# EAGLE board 2560-v2-3.0 (EAGLE 9.6.2)
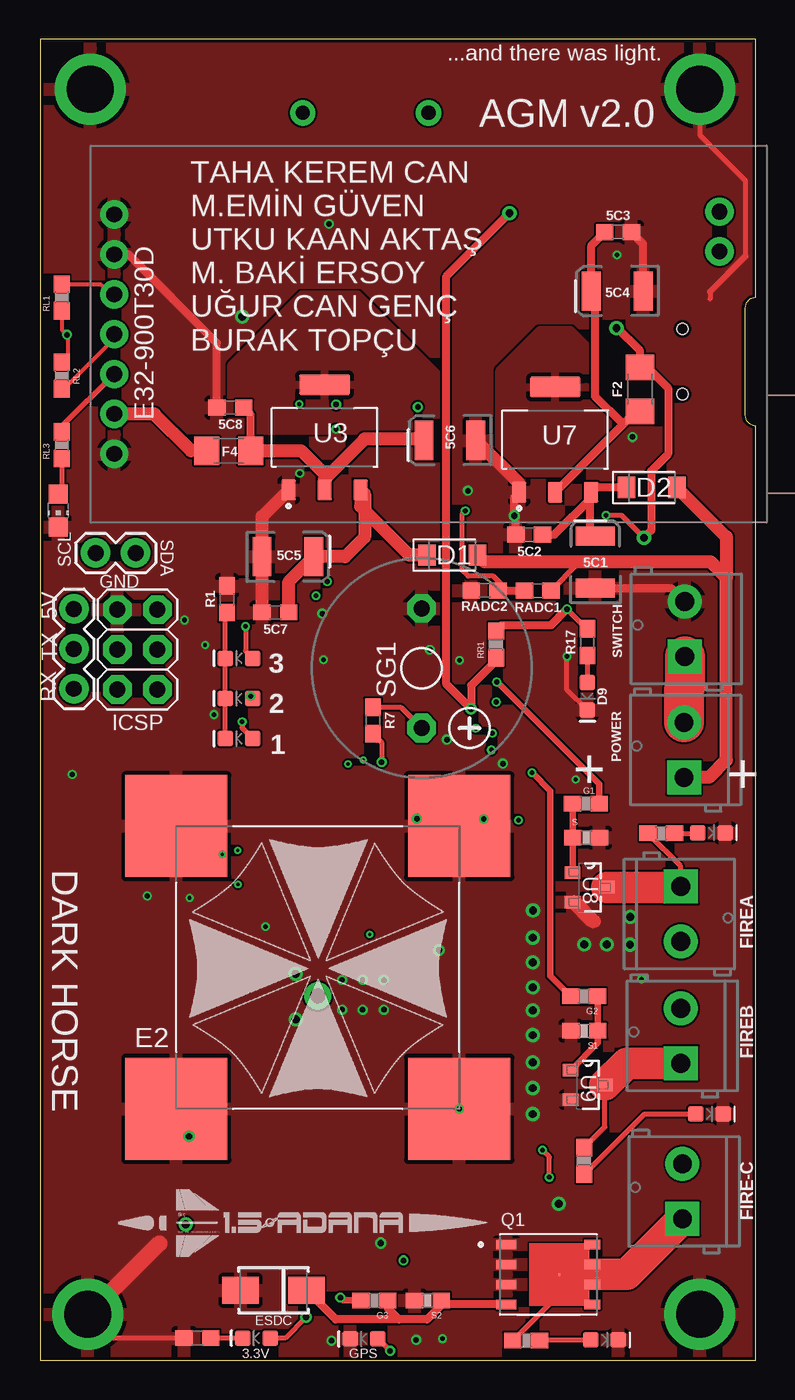
[diagram p0: board, top side]
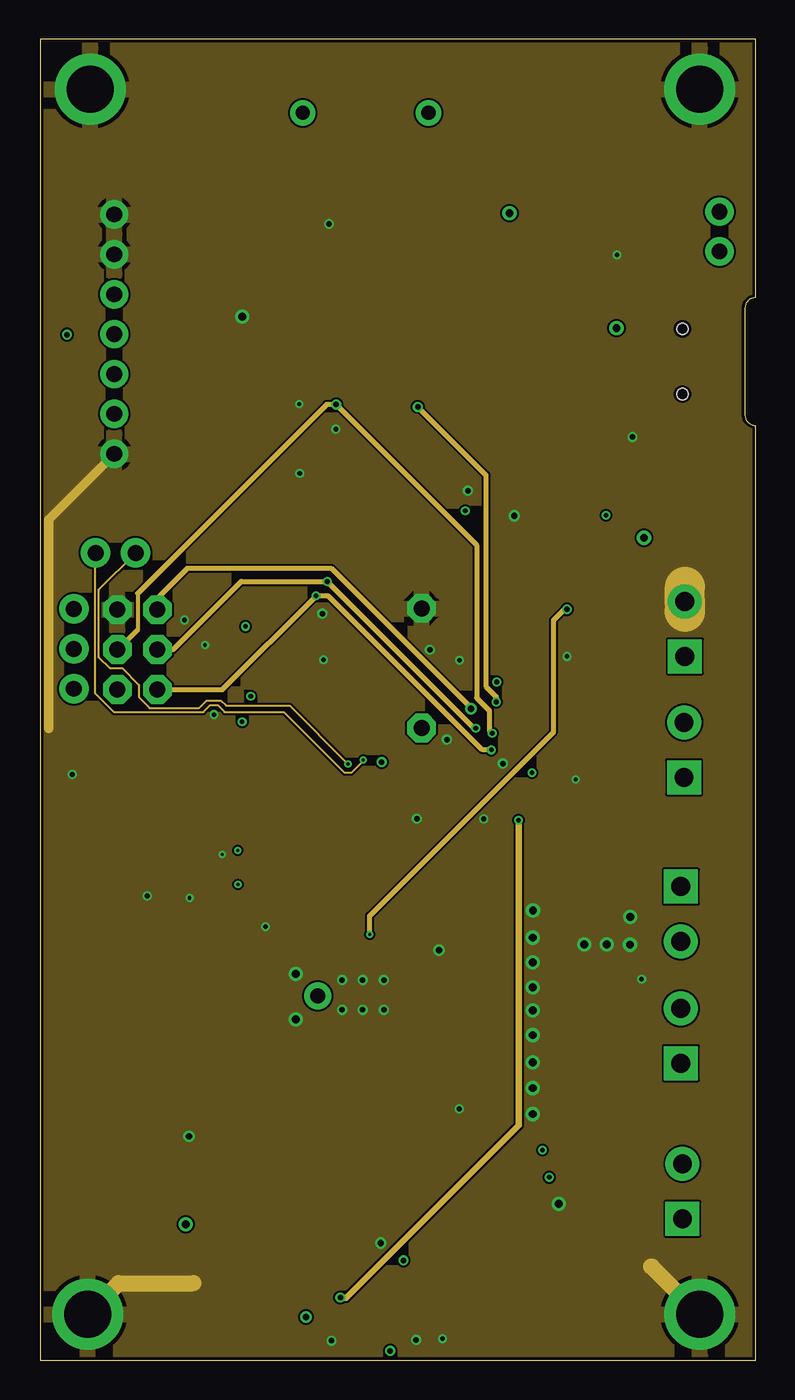
[diagram p1: board, inner layer Route2]
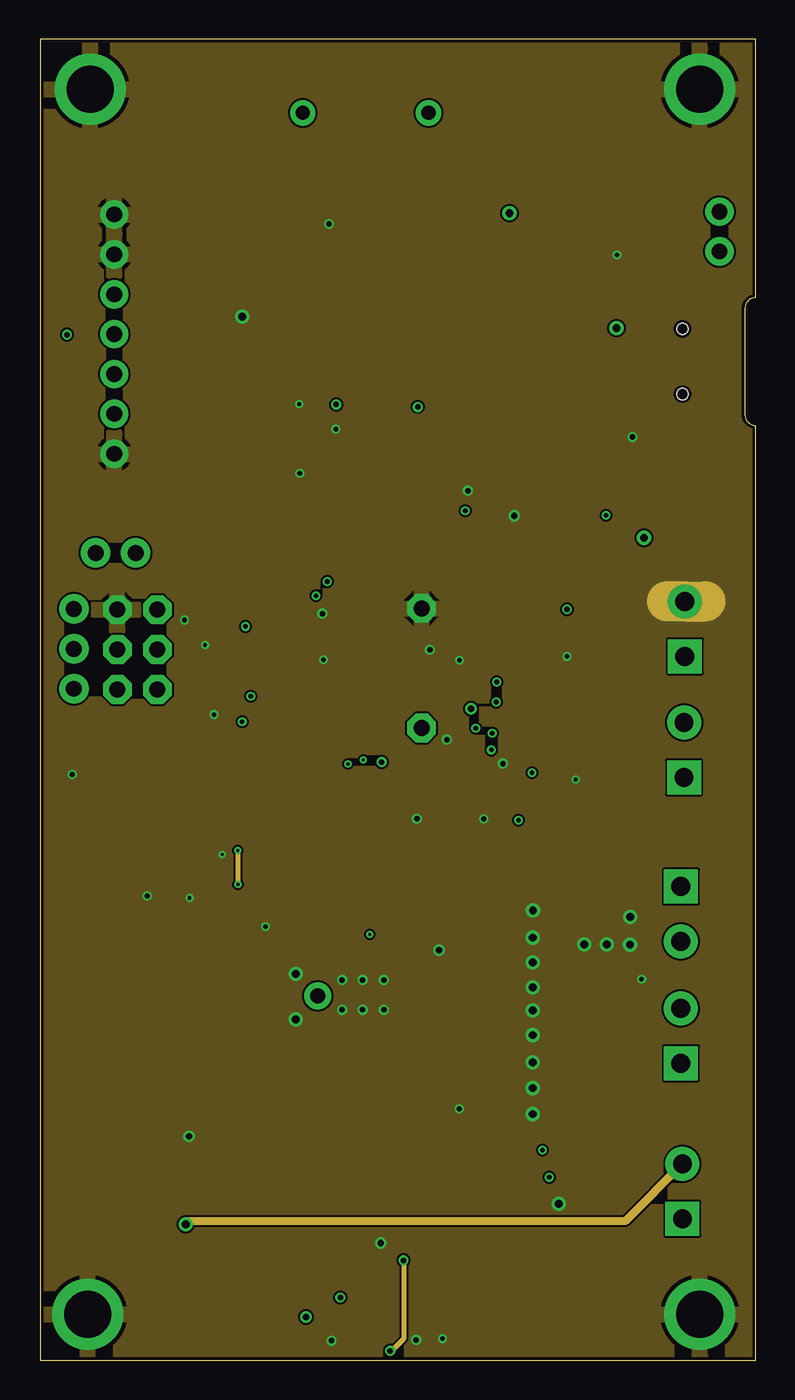
[diagram p2: board, inner layer Route15]
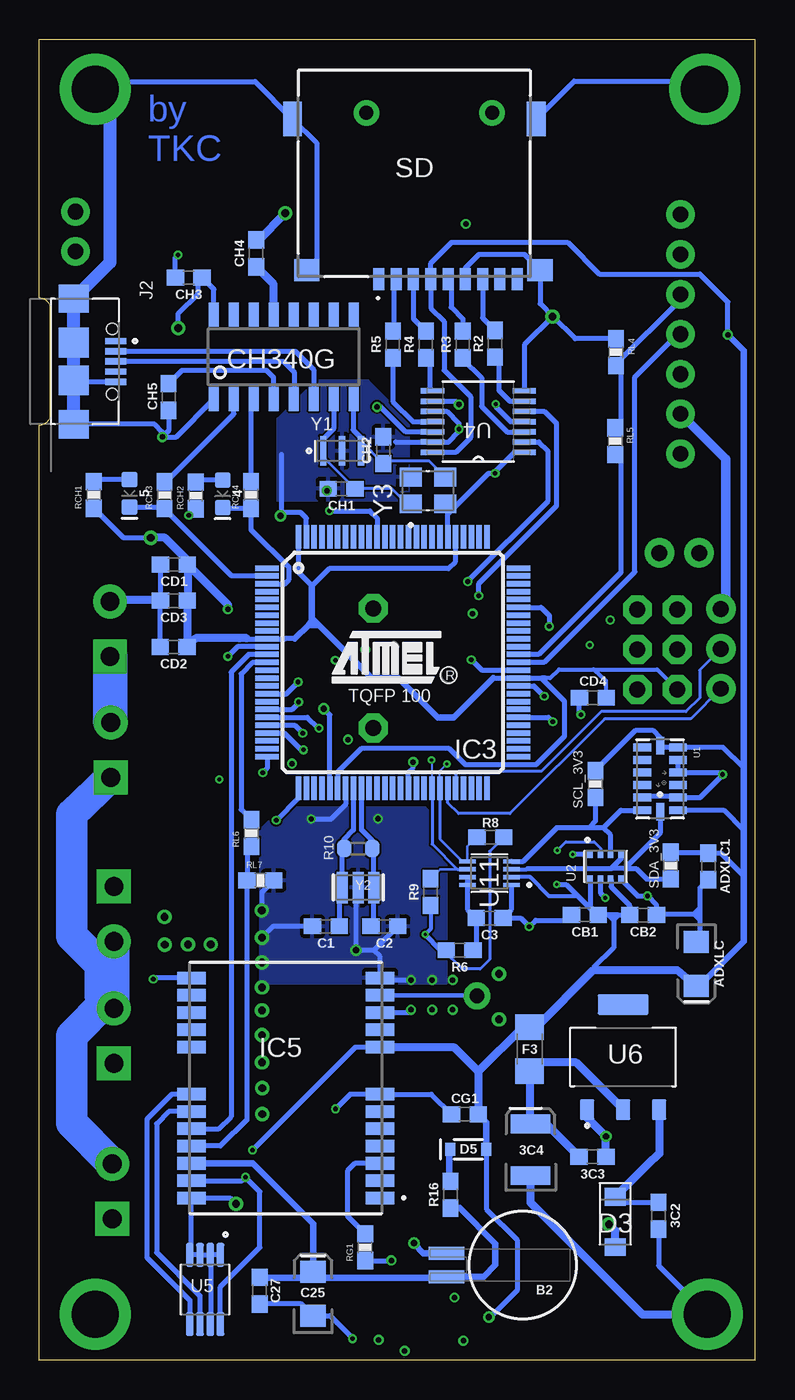
[diagram p3: board, bottom side, seen from below]

Size 45.52 x 84.08 mm. Coordinates in mm from the lower left corner, seen from the top.
Outline: 45.52,84.08 0,84.08 0,0 45.52,0 45.52,59.5 arc-90 44.84,60.18 44.84,66.95 arc-90 45.52,67.63 45.52,84.08
Copper layers (1+2*15+16): Top 0.035mm / dielectric 0.2104mm / Route2 0.0152mm / dielectric 1.065mm / Route15 0.0152mm / dielectric 0.2104mm / Bottom 0.035mm
Design rules "jlcpcb-4layers-edit2 *": minimum track width 3.5mil, minimum drill 0.2mm, track to track 5mil, track to pad 0.2mm, pad to pad 5mil, via to via 0.5mm, smd to smd 5mil, copper to edge 0.2mm, drill to drill 6mil, minimum pad ring 10mil, minimum via ring 0.13mm, stop-mask expansion 0.05mm, vias tented up to drill 0.2mm, thermal gap 10mil
Net classes: 2 gnd: width 0.305 mm, drill 0.406 mm, clearance 0.203 mm

## Footprints (pad centres in the part's own frame; a part is rotated, then mirrored left to right if it is on the bottom)
LED-0603 = smd 1 x 1: A -0.877,0; C 0.877,0
0603 = smd 1.1 x 1: 1 -0.85,0; 2 0.85,0
EIA3528 = smd 1.2 x 2.5: A 1.65,0; C -1.65,0
EIA3216 = smd 1.4 x 1.6: + 1.4,0; - -1.4,0
0603-RES = smd 1.1 x 1: 1 -0.85,0; 2 0.85,0
BATTCON-6.8MM = smd 2.25 x 0.85: + 4.87,0.75; - 4.87,-0.75
SODFL3718X115 = smd 1.115 x 1.361: 1 -1.6,0; 2 1.6,0
SOD-323 = smd 0.63 x 0.83: A 1.15,0; C -1.15,0
XDCR_ANT-GNSSCP-TH18L1 = drill 0.95: 1 0,-1.8 | smd 6.5 x 6.5: 2 9,9; 3 -9,9; 4 -9,-9; 5 9,-9
WE-TVSP_DO-214AC_UNIDIRECTIONAL = smd 2.3 x 1.7: 1 -2.1,0; 2 2.1,0
1206 = smd 1.6 x 1.8: 1 -1.4,0; 2 1.4,0
SCREWTERMINAL-3.5MM-2-NS = drill 1.2 pad 2.032 square: 1 0,0 | drill 1.2 pad 2.032: 2 3.5,0
TQFP100 = smd 1.5 x 0.35: 1 -8,6; 2 -8,5.5; 3 -8,5; 4 -8,4.5; 5 -8,4; 6 -8,3.5; 7 -8,3; 8 -8,2.5; 9 -8,2; 10 -8,1.5; 11 -8,1; 12 -8,0.5; 13 -8,0; 14 -8,-0.5; 15 -8,-1; 16 -8,-1.5; 17 -8,-2; 18 -8,-2.5; 19 -8,-3; 20 -8,-3.5; 21 -8,-4; 22 -8,-4.5; 23 -8,-5; 24 -8,-5.5; 25 -8,-6; 51 8,-6; 52 8,-5.5; 53 8,-5; 54 8,-4.5; 55 8,-4; 56 8,-3.5; 57 8,-3; 58 8,-2.5; 59 8,-2; 60 8,-1.5; 61 8,-1; 62 8,-0.5; 63 8,0; 64 8,0.5; 65 8,1; 66 8,1.5; 67 8,2; 68 8,2.5; 69 8,3; 70 8,3.5; 71 8,4; 72 8,4.5; 73 8,5; 74 8,5.5; 75 8,6 | smd 0.35 x 1.5: 26 -6,-8; 27 -5.5,-8; 28 -5,-8; 29 -4.5,-8; 30 -4,-8; 31 -3.5,-8; 32 -3,-8; 33 -2.5,-8; 34 -2,-8; 35 -1.5,-8; 36 -1,-8; 37 -0.5,-8; 38 0,-8; 39 0.5,-8; 40 1,-8; 41 1.5,-8; 42 2,-8; 43 2.5,-8; 44 3,-8; 45 3.5,-8; 46 4,-8; 47 4.5,-8; 48 5,-8; 49 5.5,-8; 50 6,-8; 76 6,8; 77 5.5,8; 78 5,8; 79 4.5,8; 80 4,8; 81 3.5,8; 82 3,8; 83 2.5,8; 84 2,8; 85 1.5,8; 86 1,8; 87 0.5,8; 88 0,8; 89 -0.5,8; 90 -1,8; 91 -1.5,8; 92 -2,8; 93 -2.5,8; 94 -3,8; 95 -3.5,8; 96 -4,8; 97 -4.5,8; 98 -5,8; 99 -5.5,8; 100 -6,8
NEO-M8T = smd 1.8 x 0.8: 1 6,-7; 2 6,-5.9; 3 6,-4.8; 4 6,-3.7; 5 6,-2.6; 6 6,-1.5; 7 6,-0.4; 8 6,2.6; 9 6,3.7; 10 6,4.8; 11 6,5.9; 12 6,7; 13 -6,7; 14 -6,5.9; 15 -6,4.8; 16 -6,3.7; 17 -6,2.6; 18 -6,-0.4; 19 -6,-1.5; 20 -6,-2.6; 21 -6,-3.7; 22 -6,-4.8; 23 -6,-5.9; 24 -6,-7
2X03 = drill 1.016 octagon: 1 -2.54,-1.27; 2 -2.54,1.27; 3 0,-1.27; 4 0,1.27; 5 2.54,-1.27; 6 2.54,1.27
1X02 = drill 1.016 pad 1.88: 1 0,0; 2 2.54,0
WE_629105136821 = smd 0.4 x 1.35: 1 -1.3,2.675; 2 -0.65,2.675; 3 0,2.675; 4 0.65,2.675; 5 1.3,2.675 | smd 1.8 x 1.9: S1 -4,0; S4 4,0 | smd 1.9 x 1.9: S2 -1.2,0; S3 1.2,0 | hole 0.7: -2.075,2.45; 2.075,2.45
CHIP-LED0805 = smd 1.2 x 1.2: A 0,-1.05; C 0,1.05
TRANS_SIRA12DP-T1-GE3 = smd 1.27 x 0.61: 1 -2.67,1.905; 2 -2.67,0.635; 3 -2.67,-0.635; 4 -2.67,-1.905 | smd 1.02 x 0.61: 5 2.795,-1.905; 6 2.795,-0.635; 7 2.795,0.635; 8 2.795,1.905 | smd 0.15 x 0.15: 9 0.69,0
R0603-ROUND = smd 0.898 x 1.1: 1 -0.889,0; 2 0.889,0
L-KLS1-TF-003-H1.85-R = smd 0.7 x 1.4: 1 2.25,10.6; 2 1.15,10.6; 3 0.05,10.6; 4 -1.05,10.6; 5 -2.15,10.6; 6 -3.25,10.6; 7 -4.35,10.6; 8 -5.45,10.6; 9 -6.55,10.6 | smd 1.6 x 1.4: 10 -8,10; 13 6.85,10 | smd 1.2 x 2.2: 11 -7.75,0.4; 12 7.75,0.4 | drill 0.9 pad 1.4: 14 3.05,0; 15 -4.95,0
F/CM12P = drill 1.016 pad 1.676 octagon: + 3.81,0; - -3.81,0
LGA14_1:1_PATRICK = smd 0.5 x 1.124: 1 2,1.138; 2 1.2,1.138; 3 0.4,1.138; 4 -0.4,1.138; 5 -1.2,1.138; 6 -2,1.138; 8 -2,-1.13; 9 -1.2,-1.138; 10 -0.4,-1.138; 11 0.4,-1.138; 12 1.2,-1.138; 13 2,-1.138 | smd 1.124 x 0.5: 7 -2.1,0; 14 2.1,0
XDCR_BMP280 = smd 0.5 x 0.35: 1 0.8,0.975; 2 0.8,0.325; 3 0.8,-0.325; 4 0.8,-0.975; 5 -0.8,-0.975; 6 -0.8,-0.325; 7 -0.8,0.325; 8 -0.8,0.975
SOT229P700X180-4N = smd 0.93 x 1.31: 1 -2.29,-3.345; 2 0,-3.345; 3 2.29,-3.345 | smd 3.24 x 1.31: 4 0,3.345
SOP65P640X110-14N = smd 1.473 x 0.356: 1 -2.921,1.956; 2 -2.921,1.295; 3 -2.921,0.66; 4 -2.921,0; 5 -2.921,-0.66; 6 -2.921,-1.295; 7 -2.921,-1.956; 8 2.921,-1.956; 9 2.921,-1.295; 10 2.921,-0.66; 11 2.921,0; 12 2.921,0.66; 13 2.921,1.295; 14 2.921,1.956
SOP65P490X110-8N = smd 1.5 x 0.49: 1 -2.105,0.975; 2 -2.105,0.325; 3 -2.105,-0.325; 4 -2.105,-0.975; 5 2.3,-0.975; 6 2.3,-0.325; 7 2.3,0.325; 8 2.3,0.975
SOT95P240X112-3N = smd 0.972 x 0.802: D 1.092,0; G -1.092,0.94; S -1.092,-0.94
SOP50P310X90-8N = smd 1.12 x 0.27: 1 -1.405,0.75; 2 -1.405,0.25; 3 -1.405,-0.25; 4 -1.405,-0.75; 5 1.405,-0.75; 6 1.405,-0.25; 7 1.405,0.25; 8 1.405,0.75
SOIC16 = smd 0.635 x 1.524: 1 -4.445,-2.695; 2 -3.175,-2.695; 3 -1.905,-2.695; 4 -0.635,-2.695; 5 0.635,-2.695; 6 1.905,-2.695; 7 3.175,-2.695; 8 4.445,-2.695; 9 4.445,2.695; 10 3.175,2.695; 11 1.905,2.695; 12 0.635,2.695; 13 -0.635,2.695; 14 -1.905,2.695; 15 -3.175,2.695; 16 -4.445,2.695
DELIK = drill 3 pad 4.5: P$1 0,0
LORA30 = drill 1 pad 1.778: 1 40,19.8; 2 40,17.26; 10 1.5,19.62; 11 1.5,17.08; 12 1.5,14.54; 13 1.5,12; 14 1.5,9.46; 15 1.5,6.92; 16 1.5,4.38
1X03 = drill 1.016 pad 1.88: 1 0,0; 2 2.54,0; 3 5.08,0
OSC_CSTCE12M0G55-R0 = smd 0.4 x 1.9: 1 -1.2,0; 2 0,0; 3 1.2,0
RESONATOR = smd 0.7 x 2: 1 -1,0; 2 0,0; 3 1,0
XTAL_ABM8G-12.000MHZ-18-D2Y-T = smd 1.2 x 1.4: 1 -0.85,1.1; 2 -0.85,-1.1; 3 0.85,-1.1; 4 0.85,1.1

## Placement (x,y rotation side)
1  [LED-0603]  12.66,39.56 180 top
2  [LED-0603]  12.66,42.12 180 top
3  [LED-0603]  12.66,44.68 180 top
3C2  100nF  [0603]  6.12,9.2 270 bottom
3C3  100nF  [0603]  10.32,12.95 0 bottom
3C4  22uF  [EIA3528]  14.27,13.4 90 bottom
4  [LED-0603]  33.85,55.16 270 bottom
5  [LED-0603]  39.78,55.17 270 bottom
5C1  22uF  [EIA3528]  35.32,50.8 90 top
5C2  100nF  [0603]  31.12,52.55 180 top
5C3  100nF  [0603]  36.77,71.8 0 top
5C4  22uF  [EIA3528]  36.72,68.05 180 top
5C5  22uF  [EIA3528]  15.77,51.15 0 top
5C6  22uF  [EIA3528]  26.07,58.55 180 top
5C7  100nF  [0603]  14.97,47.6 180 top
5C8  100nF  [0603]  12.1,60.64 180 top
ADXLC  10uF  [EIA3216]  3.71,25.23 270 bottom
ADXLC1  0.1uF  [0603]  2.95,31.43 270 bottom
APGLED  4.7k  [0603-RES]  39.52,33.54 180 top
APGLED1  4.7k  [0603-RES]  34.62,12.69 90 top
APGLED2  4.7k  [0603-RES]  30.92,1.25 180 top
B2  6.8MM_COIN_CELL  [BATTCON-6.8MM]  14.75,6.06 180 bottom
C1  18pU  [0603]  27.29,27.62 180 bottom
C2  18pU  [0603]  23.56,27.62 180 bottom
C3  100pF  [0603]  16.87,28.15 180 bottom
C25  4.7uF  [EIA3216]  28.1,4.24 90 bottom
C27  100nF  [0603]  31.49,4.43 90 bottom
CB1  100nF  [0603]  10.81,28.35 0 bottom
CB2  100nF  [0603]  7.1,28.34 180 bottom
CD1  100nF  [0603]  36.95,50.65 180 bottom
CD2  100nF  [0603]  36.97,45.4 180 bottom
CD3  100nF  [0603]  36.96,48.35 180 bottom
CD4  100nF  [0603]  10.3,42.16 0 bottom
CG1  1uF  [0603]  18.44,15.65 0 bottom
CH1  22pF  [0603]  26.29,55.47 180 bottom
CH2  22pF  [0603]  23.63,57.92 90 bottom
CH3  100nF  [0603]  36.01,68.91 180 bottom
CH4  100nF  [0603]  31.72,70.45 90 bottom
CH5  100nF  [0603]  37.29,61.31 270 bottom
D1  B5819W  [SODFL3718X115]  26.22,51.25 0 top
D2  B5819W  [SODFL3718X115]  38.92,55.55 0 top
D3  B5819W  [SODFL3718X115]  8.87,8.8 270 bottom
D4  [LED-0603]  20.6,1.36 180 top
D5  0.5A/40V/420mV  [SOD-323]  18.23,13.43 0 bottom
D6  [LED-0603]  13.76,1.41 180 top
D9  [LED-0603]  34.82,42.25 270 top
E2  ANT-GNSSCP-TH18L1  [XDCR_ANT-GNSSCP-TH18L1]  17.67,25 0 top
ESDC  12V  [WE-TVSP_DO-214AC_UNIDIRECTIONAL]  14.85,4.45 180 top
F2  1A  [1206]  38.17,61.8 90 top
F3  0.75A  [1206]  14.32,19.8 90 bottom
F4  1A  [1206]  12,57.89 180 top
FIRE-C  [SCREWTERMINAL-3.5MM-2-NS]  40.87,9 90 top
FIREA  [SCREWTERMINAL-3.5MM-2-NS]  40.77,30.15 270 top
FIREB  [SCREWTERMINAL-3.5MM-2-NS]  40.77,18.9 90 top
G1  22  [0603-RES]  34.73,35.43 0 top
G2  22  [0603-RES]  34.61,23.17 180 top
G3  22  [0603-RES]  21.27,3.8 180 top
IC3  ATMEGA2560-16AU  [TQFP100]  23.03,44.42 0 bottom
IC5  NEO-M8N-0  [NEO-M8T]  29.84,17.33 0 bottom
ICSP  ICSP  [2X03]  6.19,45.23 90 top
J1  [1X02]  3.53,51.38 0 top
J2  629105136821  [WE_629105136821]  43.33,63.57 270 bottom
ON4  GREEN  [CHIP-LED0805]  1.15,54.08 180 top
POWER  [SCREWTERMINAL-3.5MM-2-NS]  40.97,37.1 90 top
Q1  SIRA12DP-T1-GE3  [TRANS_SIRA12DP-T1-GE3]  32.34,5.46 0 top
R1  1k  [0603]  11.89,48.44 90 top
R2  3.3k  [0603]  16.52,64.7 90 bottom
R3  3.3k  [0603]  18.57,64.65 90 bottom
R4  3.3k  [0603]  20.92,64.65 90 bottom
R5  3.3k  [0603]  23.02,64.65 90 bottom
R6  200k  [0603]  18.77,26.1 180 bottom
R7  1k  [0603]  21.18,40.72 270 top
R8  1k  [0603]  16.82,33.3 180 bottom
R9  1k  [0603]  20.62,29.8 90 bottom
R10  1M  [R0603-ROUND]  25.23,32.56 180 bottom
R16  1k  [0603]  19.36,10.54 90 bottom
R17  1k  [0603]  34.82,45.7 90 top
R27  1k  [0603]  10.01,1.41 180 top
RADC1  220  [0603]  31.66,48.99 180 top
RADC2  300  [0603]  28.28,48.99 0 top
RCH1  1k  [0603-RES]  42.05,55.08 90 bottom
RCH2  1k  [0603-RES]  35.56,55.04 90 bottom
RCH3  1k  [0603-RES]  37.55,55.06 90 bottom
RCH4  1k  [0603-RES]  32.05,55.08 90 bottom
RD1  Blue  [LED-0603]  42.58,15.68 0 top
RD2  Blue  [LED-0603]  42.71,33.57 0 top
RD3  Blue  [LED-0603]  35.92,1.3 0 top
RG1  1k  [0603-RES]  24.78,7.19 90 bottom
RL1  4.7K  [0603-RES]  1.38,67.65 90 top
RL2  4.7K  [0603-RES]  1.37,62.68 270 top
RL3  330  [0603-RES]  1.38,58.24 90 top
RL4  20k  [0603-RES]  8.83,64.16 270 bottom
RL5  10k  [0603-RES]  8.87,58.5 270 bottom
RL6  10k  [0603-RES]  32.02,33.55 90 bottom
RL7  20k  [0603-RES]  31.45,30.54 0 bottom
RR1  10k  [0603-RES]  29.02,45.57 90 top
S  4.7k  [0603-RES]  34.74,33.26 0 top
S1  4.7k  [0603-RES]  34.63,20.97 180 top
S2  4.7k  [0603-RES]  24.67,3.8 180 top
SCL_3V3  10k  [0603-RES]  10.13,36.67 90 bottom
SD  L-KLS1-TF-003-H1.85-R  [L-KLS1-TF-003-H1.85-R]  21.66,79.4 180 bottom
SDA_3V3  10k  [0603-RES]  5.34,31.48 90 bottom
SG1  F/CM12P  [F/CM12P]  24.27,44.05 270 top
SWITCH  [SCREWTERMINAL-3.5MM-2-NS]  41.02,44.8 90 top
U1  ADXL345PATRICK  [LGA14_1:1_PATRICK]  6.02,37.01 270 bottom
U2  BMP280  [XDCR_BMP280]  9.49,31.42 90 bottom
U3  AMS1117-5.0  [SOT229P700X180-4N]  18.1,58.74 0 top
U4  74LVC125APW,118  [SOP65P640X110-14N]  17.58,59.74 180 bottom
U5  24AA32A-I/MS  [SOP65P490X110-8N]  34.97,4.6 270 bottom
U6  AMS1117-3.3  [SOT229P700X180-4N]  8.37,19.3 0 bottom
U7  AMS1117-5.0  [SOT229P700X180-4N]  32.77,58.6 0 top
U8  SI2308CDS-T1-GE3  [SOT95P240X112-3N]  34.97,30.1 0 top
U9  SI2308CDS-T1-GE3  [SOT95P240X112-3N]  34.84,17.52 0 top
U11  PCA9306DCUR  [SOP50P310X90-8N]  16.87,31 180 bottom
U$1  CH340G  [SOIC16]  29.97,63.87 0 bottom
U$2  [1.5-2]  4.97,3.95 0 top
U$3  [ATMEL]  26.88,41.82 0 bottom
U$4  3MM  [DELIK]  3.02,2.92 0 top
U$5  3MM  [DELIK]  41.97,2.92 0 top
U$6  3MM  [DELIK]  3.19,80.89 0 top
U$7  3MM  [DELIK]  41.97,80.89 0 top
U$8  LORA30  [LORA30]  3.22,53.31 0 top
U$11  [UMBRE]  7,12.92 0 top
UART  455-1750-1-ND  [1X03]  2.15,42.74 90 top
Y1  CSTCE12M0G55-R0  [OSC_CSTCE12M0G55-R0]  26.25,57.88 0 bottom
Y2  CSTCE16M0V53-R0 16MHZ  [RESONATOR]  25.23,30.09 0 bottom
Y3  ABM8G-12.000MHZ-18-D2Y-T  [XTAL_ABM8G-12.000MHZ-18-D2Y-T]  20.79,55.36 90 bottom

## Library data of the parts
1-5 D4 D6 D9 = SparkFun-LED
3C2 3C3 5C2 5C3 5C7 5C8 C27 CB1 CB2 = SparkFun-Capacitors; PROD_ID: CAP-00868
3C4 5C1 5C4-5C6 = SparkFun-Capacitors; PROD_ID: CAP-08310
ADXLC C25 = SparkFun-Capacitors; PROD_ID: CAP-00811
ADXLC1 = SparkFun-Capacitors; PROD_ID: CAP-00810
APGLED APGLED1 APGLED2 G1-G3 RCH1-RCH4 RG1 RL1-RL7 RR1 S S1 S2 SCL_3V3 SDA_3V3 = SparkFun-Resistors; PROD_ID: RES-08296
B2 = SparkFun-Batteries; PROD_ID: BATT-13734
C1 C2 CD1-CD4 CG1 CH1-CH5 = SparkFun-Capacitors; PROD_ID: CAP-09137
C3 = SparkFun-Capacitors; PROD_ID: CAP-07883
D1-D3 = Diode; CATEGORY: Diode; DESCRIPTION: DIODE SCHOTTKY 20V 500MA SOD123; MANUFACTURER: ON Semiconductor; MPN: MBR0520LT1G; SUB-CATEGORY: Schottky
D5 = SparkFun-DiscreteSemi; PROD_ID: DIO-10955
E2 = ANT-GNSSCP-TH18L1; AVAILABILITY: In Stock; DESCRIPTION: 1.575GHz, 1.602GHz Beidou, Galileo, GLONASS, GNSS, GPS Ceramic Patch RF Antenna 1.567GHz ~ 1.609GHz 5.1dBi, 2.8dBi, 4dBi Pin Adhesive; MF: Linx; MP: ANT-GNSSCP-TH18L1; PACKAGE: None; PRICE: None; PURCHASE-URL: https://pricing.snapeda.com/search/part/ANT-GNSSCP-TH18L1/?ref=eda
ESDC = Wurth_EMC Components_WE-TVSP; DATASHEET-URL: https://www.we-online.com/catalog/datasheet/824500102.pdf; IPEAK: 2.5A; MOUNT: SMT; PART-NUMBER: 824500102; PDISS: 400W; VBR: 117V; VCLAMP: 162V
F2-F4 = SparkFun-Fuses; PROD_ID: RES-08585
FIRE-C FIREA FIREB POWER SWITCH = SparkFun-Connectors; PROD_ID: CONN-08399
IC3 = atmel-2005
IC5 = NEO-M8N-0; DESCRIPTION: IC RECEIVER GPS/GNSS 24LCC; HEIGHT: mm; MANUFACTURER_NAME: U-Blox; MANUFACTURER_PART_NUMBER: NEO-M8N-0; MOUSER_PART_NUMBER: 377-NEO-M8N-0; MOUSER_PRICE-STOCK: https://www.mouser.co.uk/ProductDetail/u-blox/NEO-M8N-0?qs=zW32dvEIR3unZhZI0KRbew%3D%3D
ICSP = pinhead
J1 = SparkFun-Connectors
J2 = 629105136821; AVAILABILITY: In Stock; DESCRIPTION: USB - micro B USB 2.0 Receptacle Connector 5 Position Surface Mount, Right Angle; MF: Würth Elektronik; MP: 629105136821; PACKAGE: None; PRICE: None; PURCHASE-URL: https://pricing.snapeda.com/search/part/629105136821/?ref=eda
ON4 = led
Q1 = KARTSON-RE; AVAILABILITY: In Stock; DESCRIPTION: P-Channel 40 V 11A (Ta) 1.9W (Ta) Surface Mount PowerPAK® SO-8; MF: Vishay; MP: SI7463DP; PACKAGE: SO-8 Vishay; PRICE: None; PURCHASE-URL: https://pricing.snapeda.com/search/part/SI7463DP/?ref=eda
R1 R7-R9 R16 R17 R27 = SparkFun-Resistors; PROD_ID: RES-07856
R2-R5 = SparkFun-Resistors; PROD_ID: RES-07851
R6 = SparkFun-Resistors; PROD_ID: RES-09385
R10 Y2 = SmartPrj
RADC1 = SparkFun-Resistors-tkc; PROD_ID: RES-07861
RADC2 = SparkFun-Resistors-tkc; PROD_ID: RES-10328
RD1-RD3 = SparkFun-LED; PROD_ID: DIO-11154
SD = L-KLS1-TF-003-H1.85-R; DESCRIPTION: Micro SD Card Connector; HEIGHT: mm; MANUFACTURER_NAME: KLS Electronic; MANUFACTURER_PART_NUMBER: L-KLS1-TF-003-H1.85-R
SG1 = buzzer; OC_FARNELL: unknown; OC_NEWARK: unknown
U1 = Testing
U2 = BMP280; AVAILABILITY: Warning; DESCRIPTION: Pressure Sensor 4.35PSI ~ 15.95PSI (30kPa ~ 110kPa) Absolute 16b 8-SMD; MF: Bosch; MP: BMP280; PACKAGE: SMD-8 Bosch Sensortec; PRICE: None; PURCHASE-URL: https://pricing.snapeda.com/search/part/BMP280/?ref=eda
U3 U6 U7 = AMS1117-3.3; AVAILABILITY: Unavailable; DESCRIPTION: Sot223/Pkg 1-Amp 3.3-Volt Low Drop Out Voltage Regulatator; MF: Advanced Monolithic Systems; MP: AMS1117-3.3; PACKAGE: SOT-89 ams; PRICE: None
U4 = 74LVC125APW_118; AVAILABILITY: In Stock; DESCRIPTION: Buffer, Non-Inverting 4 Element 1 Bit per Element 3-State Output 14-TSSOP; MF: Nexperia USA Inc.; MP: 74LVC125APW,118; PACKAGE: TSSOP14-14 Nexperia USA Inc.; PRICE: None; PURCHASE-URL: https://pricing.snapeda.com/search/part/74LVC125APW,118/?ref=eda
U5 = 24AA32A-I_MS; AVAILABILITY: In Stock; DESCRIPTION: EEPROM Memory IC 32Kb (4K x 8) I²C 400 kHz 900 ns 8-MSOP; MF: Microchip; MP: 24AA32A-I/MS; PACKAGE: MSOP-8 Microchip; PRICE: None; PURCHASE-URL: https://pricing.snapeda.com/search/part/24AA32A-I/MS/?ref=eda
U8 U9 = IRLML6344TRPBF; AVAILABILITY: Good; DESCRIPTION: N-Channel 30V 5A (Ta) 1.3W (Ta) Surface Mount Micro3™/SOT-23; MF: Infineon Technologies; MP: IRLML6344TRPBF; PACKAGE: SOT-23 Multicomp; PRICE: None; PURCHASE-URL: https://pricing.snapeda.com/search/part/IRLML6344TRPBF/?ref=eda
U11 = PCA9306DCUR; AVAILABILITY: In Stock; DESCRIPTION: 2-bit bidirectional 400-kHz I2C/SMBus voltage level translator; MF: Texas Instruments; MP: PCA9306DCUR; PACKAGE: VSSOP-8 Texas Instruments; PRICE: None; PURCHASE-URL: https://pricing.snapeda.com/search/part/PCA9306DCUR/?ref=eda
U$1 U$3 = CH340G
U$2 U$4-U$8 U$11 = KARTSON-RE
UART = SparkFun-Connectors; PROD_ID: XXX-00000
Y1 = CSTCE12M0G55-R0; AVAILABILITY: In Stock; DESCRIPTION: 12 MHz Ceramic Resonator Built in Capacitor 33 pF ±0.2% 30 Ohms -20°C ~ 80°C Surface Mount; MF: Murata Electronics; MP: CSTCE12M0G55-R0; PACKAGE: SMD-3 Murata; PRICE: None; PURCHASE-URL: https://pricing.snapeda.com/search/part/CSTCE12M0G55-R0/?ref=eda
Y3 = ABM8G-12.000MHZ-18-D2Y-T; AVAILABILITY: In Stock; DESCRIPTION: 12 MHz ±20ppm Crystal 18pF 120 Ohms 4-SMD, No Lead; MF: Abracon; MP: ABM8G-12.000MHZ-18-D2Y-T; PACKAGE: SMD-4 Abracon; PRICE: None; PURCHASE-URL: https://pricing.snapeda.com/search/part/ABM8G-12.000MHZ-18-D2Y-T/?ref=eda

## Nets
3.3V: ADXLC1.1 ADXLC.+ CB1.2 CB2.2 CG1.2 D5.A D6.A F3.2 IC5.8 IC5.23 RL1.1 RL2.1 SCL_3V3.2 SD.4 SDA_3V3.2 U1.1 U1.6 U1.7 U2.2 U2.6 U2.8 U4.14 U5.8 U11.2
5V: CD1.1 CD2.1 CD3.1 CD4.2 CH3.1 F2.2 IC3.10 IC3.31 IC3.61 IC3.80 IC3.100 ICSP.2 R6.2 R8.1 R9.1 R17.2 RCH1.1 RCH2.1 RR1.2 U$1.16
5VL: F4.2 U$8.15 UART.3
A7: IC3.90 RADC1.2 RADC2.2
CS: IC3.19 U4.12
CS3: R5.1 U4.11
D8-A: G1.2 IC3.17
D12-B: G2.2 IC3.25
D13-C: G3.2 IC3.26
D30-LED2: 2.A IC3.60
D34-LED1: 1.A IC3.56
D39-LED3: 3.A IC3.70
D44-BUZZER: IC3.40 R7.2
DAT1: SD.8
DAT2: SD.1
DATA+: J2.3 U$1.5
DATA-: J2.2 U$1.6
DTR: CH4.2 IC3.30 ICSP.5 RR1.1
GND: 3C2.2 3C3.2 3C4.C 5C1.C 5C2.2 5C3.2 5C4.C 5C5.C 5C6.C 5C7.2 5C8.2 ADXLC1.2 ADXLC.- B2.- C1.2 C2.1 C3.1 C25.- C27.1 CB1.1 CB2.1 CD1.2 CD2.2 CD3.2 CD4.1 CG1.1 CH1.2 CH2.2 CH3.2 CH5.2 D4.C D9.C E2.2 E2.3 E2.4 E2.5 ESDC.2 IC3.11 IC3.32 IC3.62 IC3.81 IC3.99 IC5.7 IC5.10 IC5.12 IC5.13 IC5.24 ICSP.6 J2.5 J2.S1 J2.S2 J2.S3 J2.S4 ON4.C Q1.1 Q1.2 Q1.3 R1.2 R27.2 RADC2.1 RD1.C RD2.C RD3.C RL4.1 RL7.2 S1.2 S2.2 S.2 SD.6 SD.10 SD.11 SD.12 SD.13 SG1.- SWITCH.2 U1.2 U1.4 U1.5 U1.12 U2.1 U2.5 U2.7 U3.1 U4.1 U4.4 U4.7 U4.10 U4.13 U5.1 U5.2 U5.3 U5.4 U5.7 U6.1 U7.1 U8.S U9.S U11.1 U$1.1 U$4.P$1 U$5.P$1 U$6.P$1 U$7.P$1 U$8.10 U$8.11 U$8.16 Y1.2 Y2.2 Y3.2 Y3.4
GSCL: IC5.19 U5.6
GSDA: IC5.18 U5.5
HT: U7.4
HT1: U3.4
HT2: U6.4
LRX: RL1.2 RL4.2 RL5.1 U$8.12
MISO: IC3.22 ICSP.1 U4.5
MISO3: R2.1 U4.6
MOSI: IC3.21 ICSP.4 U4.9
MOSI3: R4.1 U4.8
N$1: J2.4
N$2: POWER.2 SWITCH.1
N$3: 5C1.A 5C2.1 D2.1 U7.3
N$4: RCH3.2 U$1.2
N$5: RCH4.2 U$1.3
N$6: J2.1
N$7: CH5.1 U$1.4
N$8: CH1.1 U$1.7 Y1.1 Y3.1
N$9: 5.A RCH1.2
N$10: 4.A RCH2.2
N$12: CH4.1 U$1.13
N$13: E2.1 IC5.11
N$14: 5C3.1 5C4.A F2.1 U7.2
N$15: R2.2 SD.7
N$16: D9.A R17.1
N$17: SD.9
N$18: 3C2.1 D3.1 U6.3
N$19: G1.1 S.1 U8.G
N$20: APGLED.1 RD2.A
N$21: G2.1 S1.1 U9.G
N$22: APGLED1.1 RD1.A
N$23: CH2.1 U$1.8 Y1.3 Y3.3
N$25: ESDC.1 G3.1 Q1.4 S2.1
N$26: 3C3.1 3C4.A F3.1 U6.2
N$27: RL3.2 U$8.14
N$28: ON4.A RL3.1
N$29: IC5.3 RG1.2
N$30: D6.C R27.1
N$31: 5C5.A 5C7.1 D1.1 U3.3
N$32: D4.A RG1.1
N$33: 5C6.A 5C8.1 F4.1 U3.2
N$34: 1.C 2.C 3.C R1.1
N$35: D5.C R16.2
N$36: APGLED2.1 RD3.A
N$37: R7.1 SG1.+
N$38: R3.2 SD.5
N$39: R4.2 SD.3
N$40: R5.2 SD.2
N$47: C3.2 R6.1 U11.7 U11.8
RX: 4.C IC3.3 RCH4.1
RX1: IC3.45 UART.1
RX2: IC3.12 IC5.20
RX3: IC3.63 RL2.2 U$8.13
SCK: IC3.20 ICSP.3 U4.2
SCK3: R3.1 U4.3
SCL: SDA_3V3.1 U1.14 U2.4 U11.3
SCL5: IC3.43 J1.1 R9.2 U11.6
SDA: SCL_3V3.1 U1.13 U2.3 U11.4
SDA5: IC3.44 J1.2 R8.2 U11.5
TX: 5.C IC3.2 RCH3.1
TX1: IC3.46 UART.2
TX2: IC3.13 RL6.2
TX3: IC3.64 RL5.2
TX3.3: IC5.21 RL6.1 RL7.1
V_BCKP: B2.+ C25.+ C27.2 IC5.22 R16.1
VAPG: APGLED.2 FIREA.1 U8.D
VC: APGLED2.2 FIRE-C.1 Q1.5 Q1.6 Q1.7 Q1.8 Q1.9
VCC: D1.2 D2.2 D3.2 FIRE-C.2 FIREA.2 FIREB.2 POWER.1 RADC1.1
VMAIN: APGLED1.2 FIREB.1 U9.D
XTAL1: C2.2 IC3.34 R10.1 Y2.3
XTAL2: C1.1 IC3.33 R10.2 Y2.1

## Tracks (layer width: path | path; a pad name or v marks a point on that pad's centre or on a via)
3.3V  (via drill 0.2, 0.3, 0.35, 0.41)
  Top 0.254: RL2.1 1.37,63.56 1.75,63.94 1.75,65.22 v1.71,65.26 v1.71,65.27 1.38,65.6 RL1.1
  Top 0.305: v32.4,11.65 32.4,12.93 v31.96,13.37 | v16.92,2.75 15.58,1.41 D6.A
  Route15 0.305: v12.59,30.28 12.59,32.43 v12.57,32.45
  Bottom 0.2: v12.57,32.45 12.02,33 10.22,33 9.8,32.58 U2.2
  Bottom 0.254: U11.2 14.29,30.75 13.08,29.53 11.25,29.53 10.15,28.43 10.07,28.35 CB1.2
  Bottom 0.305: IC5.23 32.62,11.43 v32.4,11.65 31.48,10.73 31.48,7.18 34,4.67 U5.8 | v31.96,13.37 25.4,19.93 IC5.8 23.81,19.9 | SCL_3V3.2 7.56,40.1 6.5,40.1 6.02,39.62 U1.7 5.92,39.01 U1.6 2.02,39.01 0.7,37.69 0.69,37.68 | D5.A 17.08,9.61 15.12,7.65 15.12,4.45 16.87,2.7 v16.92,2.75 | U2.8 10.46,28.86 CB1.2 9.29,28.34 | 8.69,28.34 CB2.2 7.95,28.94 9.14,30.13 9.14,30.6 U2.6 | 8.69,28.34 9.29,28.34 | v1.71,65.27 1.71,67.36 3.48,69.14 9.89,69.14 11.9,71.15 19.29,71.15 20.61,69.83 SD.4 20.61,66.97 19.77,66.12 19.77,63.02 18.08,61.33 18.08,58.74 19.04,57.78 U4.14 | 8.69,28.34 8.98,28.05 | 8.98,28.05 8.98,26.25 10.26,24.97 10.26,24.83 | ADXLC.+ 3.52,23.83 | U1.1 1.98,35.01 0.69,33.72 | 0.69,30.81 2.16,32.28 ADXLC1.1 5.29,32.28 SDA_3V3.2 | v12.59,30.28 12,30.28 10.15,28.43 | 8.98,28.05 9,28.05 9.29,28.34
  Bottom 0.406: D5.A 17.08,15.14 CG1.2 | v1.71,65.27 0.7,64.26 0.7,37.69 | 0.69,37.68 0.69,33.72 0.69,30.81 0.69,26.66 3.52,23.83
  Bottom 0.508: 17.59,18.38 14.77,21.2 F3.2 13.89,21.2 10.26,24.83 4.93,24.83 ADXLC.+ | 17.59,18.38 CG1.2 | 17.59,18.38 19.11,19.9 23.81,19.9
5V  (via drill 0.2, 0.3, 0.35, 0.5)
  Top 0.305: R17.2 34.77,46.55 v33.52,47.8 | v36.01,53.78 36.99,53.78 v38.42,52.35
  Top 0.508: v36.67,65.7 36.72,65.7 38.17,64.25 F2.2 38.63,63.2 39.95,61.88 39.95,57.68 38.87,56.6 38.87,52.8 v38.42,52.35 | RR1.2 29.37,46.77 32.49,46.77 v33.52,47.8
  Route2 0.305: v20.97,27.1 20.97,28.29 32.67,39.99 32.67,47.1 33.37,47.8 v33.52,47.8
  Bottom 0.203: R8.1 16.87,32.4 16.87,25.5 17.47,24.9 18.62,24.9 19.82,26.1
  Bottom 0.254: R9.1 20.62,27.45 v20.97,27.1 | ICSP.2 6.21,43.98 10.24,43.98 | 10.24,43.98 12.45,43.98 13.01,43.42 13.28,43.42 | 10.24,43.98 9.45,43.22 CD4.2
  Bottom 0.305: 36.08,48.38 CD3.1 | CD2.1 | CD1.1 36.08,50.63 | 32.34,45.95 32.33,45.96 | 32.79,45.96 32.75,45.92 IC3.10 29.89,45.92 29.26,45.92 | IC3.100 29.03,50.16 28.17,49.3 | CD1.1 36.1,50.92 | v36.67,65.7 36.67,66.64 35.45,67.86 35.45,68.62 CH3.1 34.42,68.17 U$1.16 | v20.97,27.1 19.97,26.1 19.82,26.1 R6.2 | 13.58,43.42 IC3.61 16.64,43.42 | 36.07,50.65 CD1.1 | RCH1.1 40.17,52.35 v38.42,52.35 | RCH2.1 35.6,54.19 v36.01,53.78 | 28.17,49.29 27.08,50.38 19.49,50.38 19.03,50.84 IC3.80 | 13.58,43.42 12.11,41.95 12.11,39.7 13.93,37.89 18.4,37.89 19.44,38.93 25.03,38.93 26.53,37.43 IC3.31 | 13.28,43.42 13.58,43.42
  Bottom 0.406: 28.17,49.3 28.17,49.29 28.17,47.23 | 16.64,43.42 19.15,40.91 20.18,40.91 22.69,43.42 24.36,43.42 27.77,46.83 | 28.17,47.23 28.17,47.01 28.38,46.81 | 28.38,46.81 29.26,45.92 | 28.17,47.23 27.77,46.83 | 27.77,46.83 27.79,46.81 28.38,46.81
  Bottom 0.508: 36.08,50.63 36.08,48.38 | CD3.1 CD2.1 | 36.1,50.92 37.53,52.35 v38.42,52.35 | v33.52,47.8 33.52,48.1 36.07,50.65 | CD2.1 35.56,45.96 32.79,45.96 32.33,45.96
5VL
  Top 0.813: F4.2 9.61,57.89 7.27,60.23 U$8.15
  Bottom 0.61: UART.3 1.85,48.12 1.85,57.36 U$8.15
A7  (via drill 0.3)
  Top 0.305: 29.75,48.99 28.84,49.9 27.23,49.9 26.84,50.29 26.84,53.86 v27.05,54.06
  Top 0.508: RADC2.2 29.75,48.99 RADC1.2
  Bottom 0.305: v27.05,54.06 24.48,54.06 24.03,53.61 IC3.90
CS  (via drill 0.3, 0.35)
  Route2 0.305: v29.02,41.9 29.02,42.23 28.36,42.89 28.36,56.35 v24.03,60.68
  Bottom 0.305: U4.12 22.19,59.08 23.79,60.68 v24.03,60.68 | IC3.19 29.43,41.42 29.02,41.83 v29.02,41.9
CS3
  Bottom 0.305: R5.1 23.02,61.03 21.73,59.74 U4.11
D8-A  (via drill 0.3)
  Top 0.406: v29.05,43.17 29.09,43.17 35.58,36.68 G1.2
  Bottom 0.305: IC3.17 29.8,42.42 v29.05,43.17
D12-B  (via drill 0.3)
  Top 0.406: v31.3,37.4 32.47,36.23 32.47,24.46 G2.2
  Bottom 0.305: IC3.25 31.03,37.67 v31.3,37.4
D13-C  (via drill 0.3, 0.35)
  Top 0.406: G3.2 19.29,3.8 v19.1,3.99
  Route2 0.406: v19.1,3.99 19.47,3.99 30.44,14.96 v30.44,34.37
  Bottom 0.305: IC3.26 29.03,35.78 v30.44,34.37
D30-LED2  (via drill 0.3)
  Top 0.152: 2.A v13.39,42.26
  Bottom 0.305: IC3.60 14.05,42.92 v13.39,42.26
D34-LED1  (via drill 0.3)
  Top 0.305: v12.85,40.64 12.85,40.25 1.A
  Bottom 0.305: IC3.56 13.13,40.92 v12.85,40.64
D39-LED3  (via drill 0.3)
  Top 0.305: 3.A 13.07,45.15 v13.07,46.71
  Bottom 0.305: IC3.70 13.59,47.92 13.07,47.4 v13.07,46.71
D44-BUZZER  (via drill 0.35)
  Top 0.305: R7.2 21.73,39.32 v21.73,38.07
  Bottom 0.305: IC3.40 22.03,37.4 21.73,37.7 v21.73,38.07
DATA+
  Bottom 0.305: J2.3 40.64,63.59 30,63.59 29.31,62.9 29.31,61.2 U$1.5
DATA-
  Bottom 0.305: J2.2 29.23,64.22 28.06,63.05 U$1.6
DTR  (via drill 0.4, 0.5)
  Top 0.305: RR1.1 29.02,44.55
  Top 0.508: v29.86,73.01 25.84,68.99 25.84,43.04 v27.42,41.46 27.42,42.95 29.02,44.55
  Route2 0.305: ICSP.5 7.46,48.49 9.39,50.42 18.51,50.42 27.42,41.51 v27.42,41.46
  Bottom 0.305: IC3.30 27.03,36.47 27.03,41.07 v27.42,41.46
  Bottom 0.508: CH4.2 31.57,71.3 v29.86,73.01
GND  (via drill 0.2, 0.25, 0.3, 0.35, 0.4, 0.41, 0.5)
  Top 0.305: R27.2 4.58,1.41 3.07,2.92 U$4.P$1 | D9.C 33.52,42.67 v33.52,44.8 | U$7.P$1 41.99,80.87 41.97,77.98 44.88,75.07 44.88,70.26 | 42.63,68.01 42.63,67.56
  Top 0.406: 44.88,70.26 42.63,68.01
  Top 0.508: U7.1 30.17,54.95 v30.17,53.75 30.27,53.65 5C2.2 | 5C4.C 38.37,71.05 5C3.2 | 5C8.2 11.25,64.75 5.61,70.39 U$8.11 | SWITCH.2 40.17,49.15 5C1.C
  Top 0.813: 5C7.2 5C5.C 14.12,53.7 U3.1 | 5C6.C 30.48,55.79 U7.1 | U8.S 35.1,27.94 35.27,27.94 34.05,29.16 U8.S
  Top 1.016: U$4.P$1 3.06,2.92 7.58,7.44
  Route2 0.61: U$8.16 0.56,53.52 0.56,40.2
  Route2 1.016: U$4.P$1 5,4.9 9.75,4.9 | U$5.P$1 38.92,5.95 38.86,5.95
  Route2 2.54: 41.03,49.23 41.02,49.22 SWITCH.2 41.01,47.66 41.03,47.64
  Route15 2.54: 39.89,48.3 SWITCH.2 42.32,48.3
  Bottom 0.2: Y3.2 19.37,54.19 19.2,54.19
  Bottom 0.305: U1.12 7.06,35.91 4.98,35.91 U1.2 3.48,35.81 2.04,37.25 v2.04,37.29 2.16,37.41 U1.4 U1.5 | 3C2.2 6.12,6.02 U$4.P$1 | v21.87,24.2 23.71,24.2 IC5.12 23.84,25.69 24.24,26.09 | IC5.10 22.04,22.13 v21.87,22.3 | CG1.1 20.57,16.93 IC5.7 25.74,16.93 E2.5 | IC5.13 38.19,24.33 v38.27,24.25 | v25.59,1.38 25.57,1.4 27.01,2.84 C25.- 28.84,3.58 C27.1 | IC3.32 26.03,35.36 26.96,34.44 v28.21,34.44 v28.22,34.45 | IC3.62 17.36,43.92 v18.03,44.59 | CD2.2 CD3.2 CD1.2 | IC3.11 32.9,45.42 v33.52,44.8 | v11.58,32.19 11.55,32.22 U2.1 | U2.7 9.81,29.75 v9.5,29.44 | CB1.1 12.01,28 13.94,28 v14.34,27.6 14.89,28.15 C3.1 15.46,28.71 U11.1 | U2.5 7.44,29.55 v6.82,29.55 6.25,28.98 CB2.1 6.19,28.4 3.83,28.4 | IC3.99 28.53,53.6 28.89,53.96 29.96,53.96 v30.17,53.75 30.11,53.81 30.11,57.66 | U$7.P$1 41.46,81.38 31.79,81.38 SD.12 27.86,77.45 27.86,70.05 SD.13 | v37.69,58.77 36.82,58.77 U$1.1 | CH5.2 37.29,59.17 v37.69,58.77 | J2.S4 38.18,59.57 37.69,59.08 v37.69,58.77 | J2.5 43.23,62.27 J2.S3 | CH3.2 36.86,70.2 v36.71,70.35 v36.7,70.35 | RL4.1 11.43,65.01 v12.86,66.44 | v12.86,66.44 v12.87,66.44 14.66,64.64 U4.7 | v12.86,66.44 13.66,67.24 SD.10 14.64,70.38 17.55,70.38 18.41,69.52 SD.6 | U4.1 15.3,57.78 16.52,56.57 v16.52,56.45 16.94,56.45 19.2,54.19 19.53,53.86 IC3.81 | U4.10 19.6,60.4 18.82,59.62 v18.82,59.27 18.82,59.09 19.46,58.45 U4.13 22.86,58.45 | v16.47,60.84 16.47,60.69 15.53,59.74 U4.4 | U5.1 34.49,6.71 | 34.49,6.71 U5.2 U5.3 U5.4 35.84,6.81 IC5.24 33.37,10.33 v33,9.96 | U5.7 34.62,2.52 34.62,6.57 34.49,6.71 | v11.06,41.09 11.15,41.18 CD4.1 | SD.11 11.49,81.42 3.72,81.42 U$6.P$1 | ADXLC.- 3.49,26.85 3.49,28.06
  Bottom 0.305: 3.49,28.76 3.49,30.04 ADXLC1.2 | 3.49,28.76 3.49,28.06 | 3.49,28.06 3.83,28.4 | 3.83,28.4 3.83,28.42 3.49,28.76 | RL7.2 31.36,29.78 v31.36,28.62 | Y2.2 25.37,29.95 v25.37,26.09 | v25.37,26.09 v25.38,26.09 | C1.2 30.63,27.62 v31.35,26.9 | C2.1 24.24,26.09 | 24.24,26.09 v25.37,26.09
  Bottom 0.406: B2.- 21.08,6.81 21.67,7.4 v21.67,7.45
  Bottom 0.508: U6.1 10.66,15.44 v9.47,14.25 3C3.2 | 3C4.C 14.27,10.04 7.15,2.92 U$4.P$1 | CD3.2 37.87,48.41 40.91,48.41 SWITCH.2
  Bottom 0.813: J2.S4 J2.S3 J2.S2 J2.S1 41.03,69.87 41.03,79.97 U$7.P$1
  other vias: 20.52,24.2 19.22,24.2 19.22,22.3 20.52,22.3 16.27,21.7 16.27,24.6 26.67,16 31.34,15.67 31.34,17.32 31.35,18.95 31.35,22.27 31.35,20.69 31.35,23.73 31.35,25.33 34.62,26.47 36.06,26.46 37.53,26.45 37.55,28.21 9.19,47.12 34.08,36.96 10.49,45.52 18.54,1.25 23.93,1.3 26.68,44.55 18.38,72.33 23.97,34.47 27.22,55.35 25.88,39.51 24.79,45.22 29.44,37.98 17.95,47.52
  pour Top (rank 2): 2.02,-5.75 -3.63,-0.1 -3.63,84.1 1.32,89.05 46.52,89.05 51.97,83.6 51.97,0.3 45.92,-5.75
  pour Route2: 2.94,-2.95 -0.96,0.95 -0.96,83.08 1.21,85.25 44.52,85.25 46.82,82.95 46.82,0.2 43.67,-2.95
  pour Route15: 2.97,-4.45 -1.58,0.1 -1.58,83.85 2.22,87.65 45.12,87.65 49.97,82.8 49.97,1 44.52,-4.45
  pour Bottom: 19.63,23.99 19.63,33.84 20.97,35.18 30.08,35.18 31.47,33.79 31.47,23.99
  pour Bottom: 22.02,54.73 22.02,59.79 24.59,62.36 27.92,62.36 30.34,59.94 30.34,54.73
GSCL
  Bottom 0.305: IC5.19 37.27,15.83 38.05,15.05 38.05,6.86 35.3,4.11 U5.6
GSDA
  Bottom 0.305: IC5.18 37.08,16.93 38.67,15.34 38.67,6.55 35.95,3.83 U5.5
HT
  pour Top: 29.22,56.43 29.22,62.99 31.82,65.59 33.73,65.59 36.31,63.01 36.31,56.62 36.12,56.43
HT1
  pour Top: 12.16,59.13 12.16,63.35 16.68,67.87 20.17,67.87 25.45,62.59 25.45,59.13
LRX
  Top 0.254: RL1.2 1.42,68.46 3.88,68.46 U$8.12
  Bottom 0.305: U$8.12 4.72,67.5 8.83,63.39 RL4.2 8.51,62.99 8.51,59.71 RL5.1
MISO  (via drill 0.3)
  Route2 0.305: v28.71,38.85 v28.7,38.84 28.14,38.84 18.32,48.65 v17.55,48.65 11.59,42.69 ICSP.1
  Bottom 0.305: U4.5 13.39,60.4 12.6,59.61 12.6,54.39 17.55,49.43 v17.55,48.65 | IC3.22 29.93,39.92 28.86,38.85 v28.71,38.85
MISO3
  Bottom 0.305: R2.1 16.28,63.61 16.28,61.74 15.57,61.03 U4.6
MOSI  (via drill 0.3, 0.35)
  Route2 0.254: 6.2,48.81 6.2,46.51
  Route2 0.305: v28.76,39.91 28.59,40.08 28.59,41.35 27.78,42.16 27.78,51.88 v18.83,60.83 18.22,60.83 6.2,48.81 | ICSP.4 6.2,46.51
  Bottom 0.305: U4.9 19.04,61.03 v18.83,60.83 | IC3.21 29.27,40.42 v28.76,39.91
MOSI3
  Bottom 0.305: R4.1 20.68,63.56 20.68,61.88 U4.8
N$2
  Top 2.54: SWITCH.1 41.02,42.86 | POWER.2 40.97,42.67 40.99,42.69
  Bottom 2.2: SWITCH.1 41.02,40.65 POWER.2
N$3
  Top 0.508: D2.1 35.36,55.55 U7.3 | 5C1.A 35.01,52.76 35.01,55.25 U7.3 | 5C2.1 32.72,52.55 35.06,54.89 U7.3
N$4
  Bottom 0.305: U$1.2 33.15,60.22 37.46,55.91 RCH3.2
N$5
  Bottom 0.305: U$1.3 32.05,61 RCH4.2
N$7
  Bottom 0.305: U$1.4 30.61,62.54 31.06,63 36.45,63 CH5.1
N$8
  Bottom 0.2: Y3.1 21.95,54.45 22.06,54.45 23.08,55.47 CH1.1 27.45,57.48 Y1.1
  Bottom 0.305: U$1.7 26.79,59.29 27.45,58.64 Y1.1
N$9
  Bottom 0.305: 5.A 41.93,56.05 RCH1.2
N$10
  Bottom 0.305: 4.A 35.41,56.04 RCH2.2
N$12
  Bottom 0.508: U$1.13 30.61,68.48 CH4.1
N$13
  Bottom 0.293: IC5.11 17.7,23.23 E2.1
N$14
  Top 0.508: U7.2 37.09,59.57 | 37.09,59.57 37.92,60.4 F2.1 | 37.09,59.57 35.32,61.35 35.32,67.81 5C4.A 35.07,70.95 5C3.1
N$15
  Bottom 0.305: SD.7 17.31,66.34 R2.2
N$16
  Top 0.305: R17.1 D9.A
N$18
  Bottom 0.305: D3.1 8.52,10.05 3C2.1
  Bottom 0.508: D3.1 6.76,12.51 6.07,13.16 U6.3
N$19
  Top 0.406: U8.G 33.88,33.25 S.1 G1.1
N$20
  Top 0.305: APGLED.1 41.8,33.54 RD2.A
N$21
  Top 0.406: U9.G 35.48,20.19 S1.1 35.48,23.15 G2.1
N$22
  Top 0.305: APGLED1.1 38.46,15.68 RD1.A
N$23
  Bottom 0.2: Y3.3 20.72,57.24 23.46,57.24 CH2.1 25.05,58.49 25.05,58.7
  Bottom 0.305: U$1.8 25.55,61.14 25.55,59.2 25.05,58.7 Y1.3
N$25
  Top 0.508: 22.82,2.6 24.62,2.6 25.52,3.5 S2.1 25.72,3.6 29.62,3.6 Q1.4 | 22.82,2.6 22.12,3.3 G3.1 | 22.82,2.6 18.8,2.6 ESDC.1
N$26
  Bottom 0.508: U6.2 11.37,18.95 13.77,18.95 F3.1 14.27,18.35 3C4.A 13.27,15.05 3C3.1
N$27
  Top 0.305: RL3.2 1.38,59.45 4.7,62.77 U$8.14
N$28
  Top 0.305: RL3.1 1.38,55.36 ON4.A
N$29
  Bottom 0.305: IC5.3 25.44,12.53 25.92,12.05 25.92,9.18 RG1.2
N$30
  Top 0.305: D6.C R27.1
N$31
  Top 0.813: D1.1 23.49,51.25 20.39,54.35 U3.3 20.64,55.14 20.64,52.38 19.41,51.15 5C5.A 15.82,49.55 5C7.1
N$32  (via drill 0.35)
  Top 0.305: v22.27,0.6 21.51,1.36 D4.A
  Route15 0.305: v23.12,6.35 23.12,1.35 22.37,0.6 v22.27,0.6
  Bottom 0.305: RG1.1 23.18,6.34 23.17,6.35 v23.12,6.35
N$33
  Top 0.508: F4.1 13.4,60.19 5C8.1
  Top 0.813: F4.1 16.61,57.89 18.1,56.39 U3.2 18.1,56.09 20.64,58.64 24.33,58.64 5C6.A
N$34
  Top 0.305: 1.C 2.C 11.77,42.13 11.77,44.67 3.C 11.78,47.48 R1.1
N$35
  Bottom 0.406: R16.2 19.42,11.45 19.42,13.39 D5.C
N$36
  Top 0.305: APGLED2.1 31.82,1.3 RD3.A
N$37
  Top 0.305: R7.1 22.94,41.57 SG1.+
N$38
  Bottom 0.305: SD.5 19.31,68.6 19.31,67.02 18.57,66.28 R3.2
N$39
  Bottom 0.305: SD.3 21.71,66.29 R4.2
N$40
  Bottom 0.305: SD.2 22.98,68.63 22.98,65.54 R5.2
N$47
  Bottom 0.305: R6.1 17.9,26.1 17.72,26.28 C3.2 18.27,28.71 U11.8 U11.7
RX
  Bottom 0.305: IC3.3 29.9,49.42 29.62,49.7 29.62,50.44 32.05,52.87 RCH4.1 32.03,54.25 33.82,54.25 4.C
RX1
  Bottom 0.2: UART.1 4.07,40.82 9.55,40.82 15.57,34.8 15.57,34.79 18.84,34.79 19.53,35.48 IC3.45
RX2
  Bottom 0.305: IC5.20 34.09,14.73 33.32,15.5 33.32,43.8 32.2,44.92 IC3.12
RX3
  Top 0.254: U$8.13 4.72,65.03 1.57,61.88 1.42,61.88 RL2.2
  Bottom 0.305: IC3.63 15.01,44.44 13.37,44.44 7.63,50.18 7.63,62.59 4.91,65.31 U$8.13
SCK  (via drill 0.3)
  Route2 0.305: v27.72,40.23 27.59,40.23 v18.26,49.56 v18.26,49.57 12.8,49.57 8.46,45.23 ICSP.3
  Bottom 0.305: U4.2 13.72,58.45 13.18,57.9 13.18,54.67 18.26,49.59 v18.26,49.57 | IC3.20 28.47,40.92 27.78,40.23 v27.72,40.23
SCK3
  Bottom 0.305: R3.1 18.57,63.73 17.38,62.54 17.38,60.71 15.75,59.08 U4.3
SCL
  Bottom 0.254: 14.46,31.28 14.49,31.25 U11.3
  Bottom 0.305: 14.46,31.28 9.13,31.28 9.12,31.29 | 8.28,31.29 9.12,31.29 | U1.14 6.02,33.55 8.28,31.29 | U2.4 8.51,31.89 9.12,31.29 | 8.28,31.29 7.54,31.29 6.88,30.63 SDA_3V3.1
SCL5  (via drill 0.2)
  Route2 0.127: v20.56,38.21 20.56,38.15 19.81,37.4 19.36,37.4 15.5,41.26 11.74,41.26 11.31,41.69 10.81,41.69 10.38,41.26 4.69,41.26 3.49,42.46 3.49,51.34 J1.1
  Bottom 0.127: IC3.43 20.56,36.45 v20.56,38.21
  Bottom 0.152: R9.2 20.02,31.25 18.72,31.25
  Bottom 0.2: U11.6 18.72,31.25 18.92,31.25 20.53,32.86 IC3.43
SDA
  Bottom 0.305: U2.3 9.16,33.42 9.63,33.88 | U1.13 8.51,35 9.63,33.88 | 9.63,33.88 10.56,33.88 | 10.56,33.88 12.61,33.88 14.73,31.75 U11.4 | SCL_3V3.1 10.13,34.31 10.56,33.88
SDA5  (via drill 0.2)
  Route2 0.127: v19.59,37.95 15.87,41.66 11.83,41.66 11.5,41.99 10.6,41.99 10.12,41.51 6.97,41.51 6.28,42.2 6.28,42.99 5.22,44.05 4.43,44.05 3.74,44.74 3.74,49.05 J1.2
  Bottom 0.127: IC3.44 20.03,37.5 v19.59,37.95
  Bottom 0.152: R8.2 18.27,32.7 U11.5
  Bottom 0.2: IC3.44 20.03,33.19 18.59,31.75 U11.5
TX
  Bottom 0.305: IC3.2 33.28,49.92 37.41,54.04 37.41,54.06 RCH3.1 37.63,54.29 5.C
TX1
  Bottom 0.2: UART.2 3.51,43.92 3.51,42.15 4.38,41.28 9.77,41.28 13.57,37.48 18.84,37.48 19.03,37.29 IC3.46
TX2
  Bottom 0.305: IC3.13 31.05,44.4 31.96,44.4 32.67,43.69 32.67,35.05 RL6.2
TX3
  Bottom 0.305: RL5.2 8.52,57.3 8.52,50.15 13.75,44.92 IC3.64
TX3.3
  Bottom 0.305: RL6.1 32.3,32.42 RL7.1 32.3,15.32 33.99,13.63 IC5.21
V_BCKP
  Bottom 0.406: R16.1 18.77,9.69 16.5,7.42 16.5,6.06 17.25,5.31 B2.+ 19.67,5.26 27.72,5.26 C25.+ | C25.+ 28.1,8.69 31.94,12.53 IC5.22 | C27.2 31.45,5.24 28.5,5.24 C25.+
VAPG
  Top 0.305: APGLED.2 40.72,31.49 40.72,30.1
  Top 2: U8.D 40.72,30.1 FIREA.1
VC
  Top 0.305: Q1.9 33.03,4.21 APGLED2.2
  Top 2: Q1.9 37.33,5.46 FIRE-C.1
VCC  (via drill 0.5)
  Top 0.305: RADC1.1 34.15,50.63 34.15,50.81
  Top 0.813: D2.2 43.67,52.4 43.67,49.8 | 43.67,49.8 43.67,38.2 42.57,37.1 POWER.1 | D1.2 28.26,50.81 34.15,50.81 42.66,50.81 43.67,49.8
  Route15 0.508: FIRE-C.2 37.22,8.85 9.47,8.85 v9.27,8.65
  Bottom 0.508: v9.27,8.65 8.87,8.25 D3.2
  Bottom 2: POWER.1 41,37.1 43.47,34.73 43.47,27 41.56,25.09 40.77,24.3 | 40.77,24.3 FIREB.2 41.25,22.88 43.47,20.65 43.47,15.1 FIRE-C.2 | FIREA.2 40.77,24.3
  Bottom 2.2: 41.56,25.09 41.56,23.19 41.25,22.88
VMAIN
  Top 0.305: APGLED1.2 35.93,14.85 U9.D
  Top 2: U9.D 37.31,18.9 FIREB.1
XTAL1
  Bottom 0.305: IC3.34 25.03,33.78 24.79,33.54 | C2.2 24.23,27.8 Y2.3 24.23,32.45 R10.1 24.34,33.1 24.79,33.54 | 24.79,33.54 25.02,33.78
XTAL2
  Bottom 0.305: C1.1 26.44,29.88 Y2.1 26.23,32.45 R10.2 26.12,33.16 25.54,33.74 | 25.54,33.74 25.54,33.75 | 25.54,33.74 25.53,33.75 IC3.33

## Text on the board
Bottom: by / TKC
tPlace: ...and there was light. | AGM v2.0 | TAHA KEREM CAN / M.EMİN GÜVEN / UTKU KAAN AKTAŞ / M. BAKİ ERSOY / UĞUR CAN GENÇ / BURAK TOPÇU | SDA | SCL | GND | 5V | TX | RX | + | + | DARK HORSE | 3.3V | GPS
tDocu: BMP/204-205
205bmp: Follow the white rabbit.